# Altium PCB PCB3.PcbDoc
Units mm, origin at the board's own origin, x right, y up, seen from the top; angles counter-clockwise.
Board outline 70.1 x 70.1 mm, 2 copper layers (Top Layer, Bottom Layer); 61 components, 64 nets, 281 pads, 0 vias.
Unrouted connection lines stored in the file: 170.
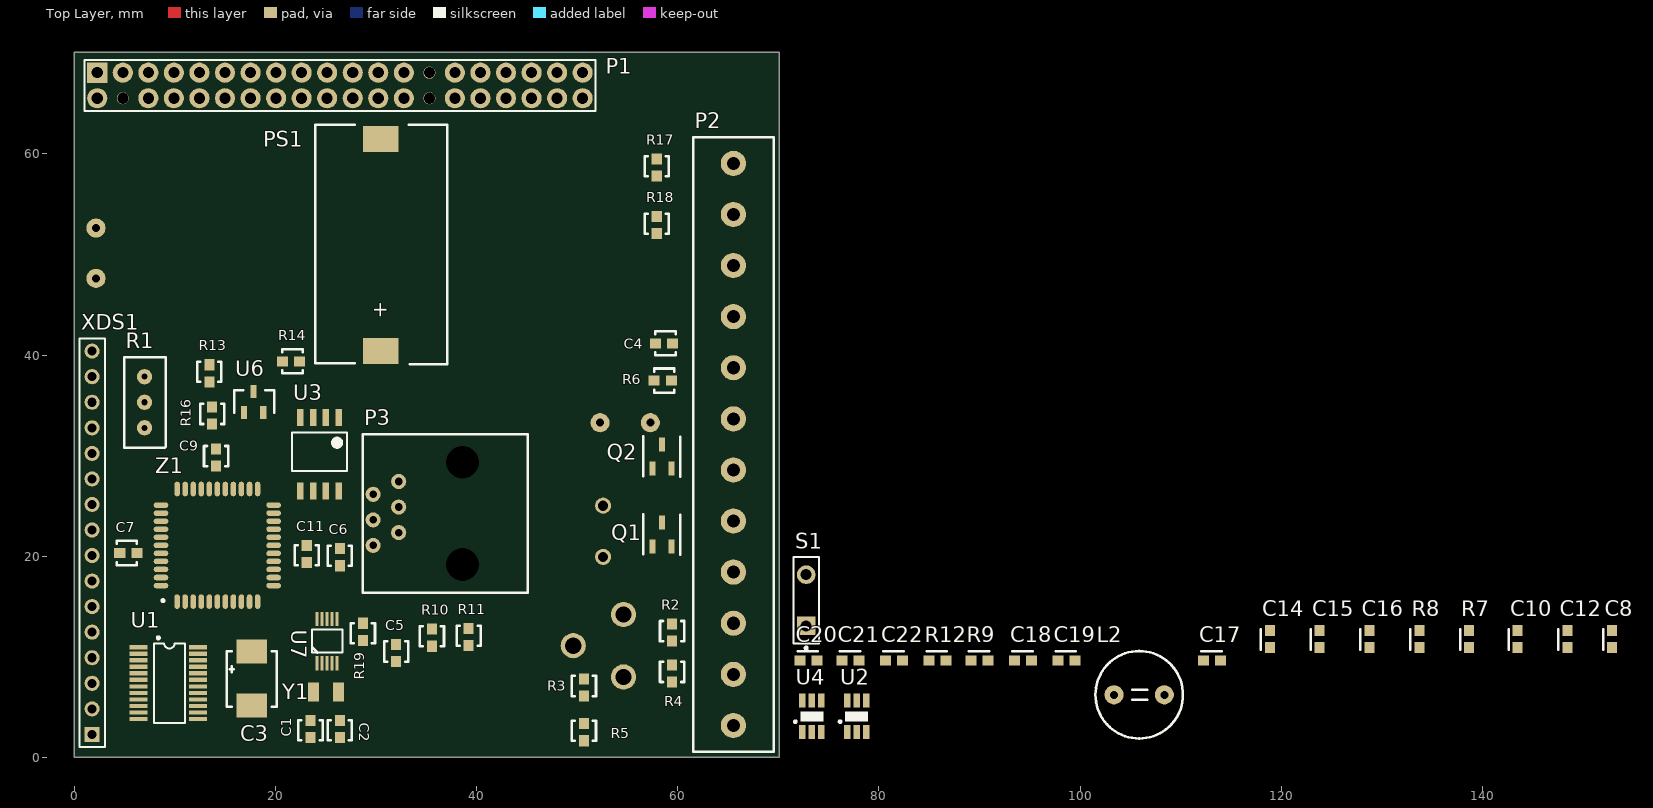
[diagram p0: Top Layer view]
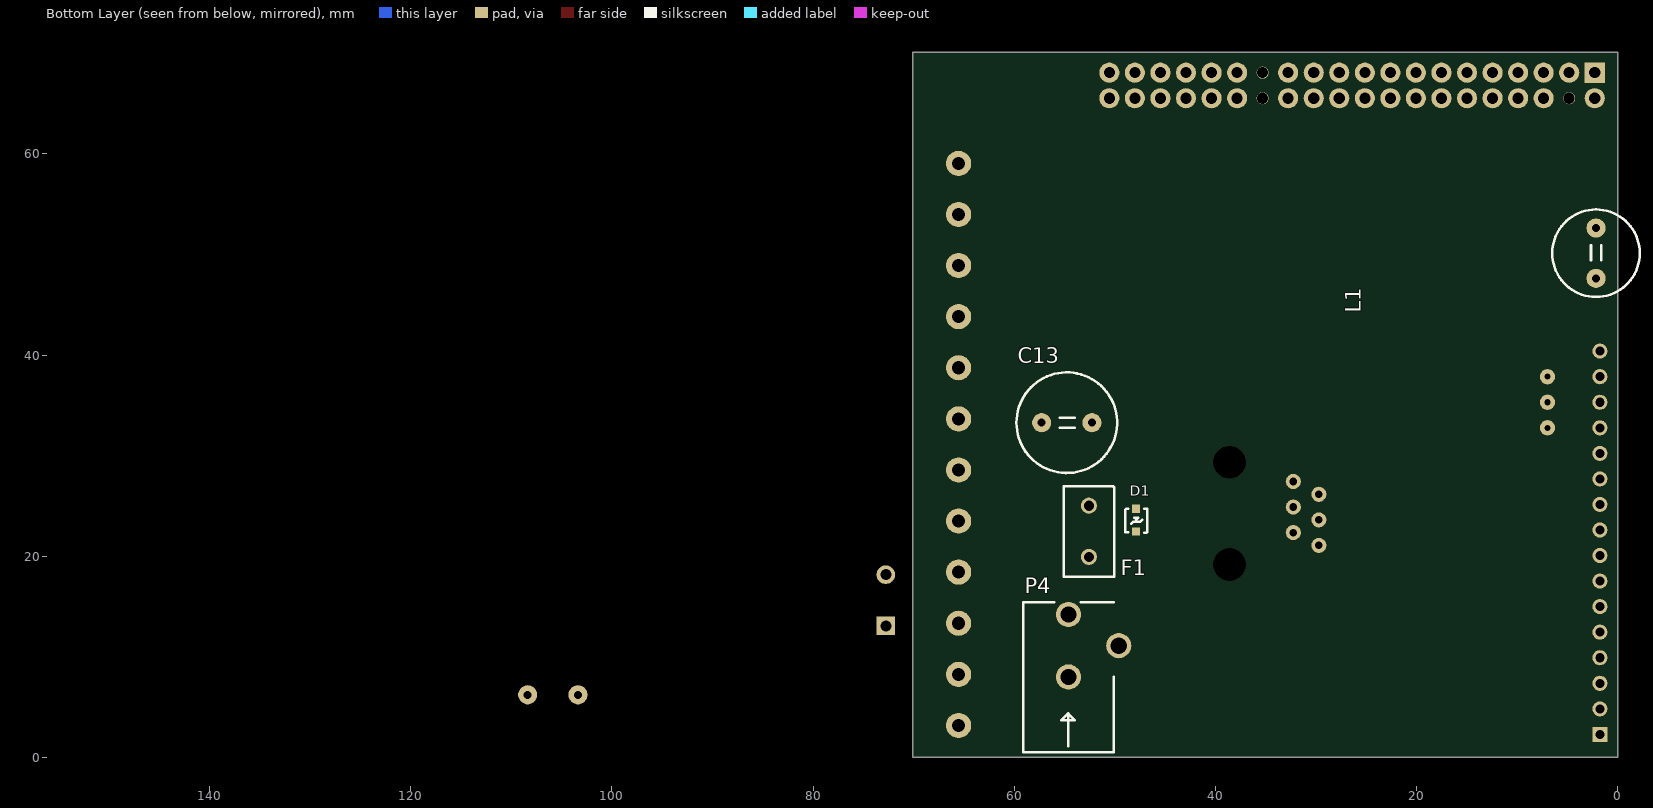
[diagram p1: Bottom Layer view, seen from below]

## Layer stack, top to bottom
Top Solder: solder mask 0.0102, Solder Resist, Dk 3.5
Top Layer: signal copper 0.0356
Dielectric 1: dielectric 0.32, FR-4, Dk 4.8
Bottom Layer: signal copper 0.0356
Bottom Solder: solder mask 0.0102, Solder Resist, Dk 3.5

## Board outline
0,0 70.104,0 70.104,70.104 0,70.104

## Design rules (kind name [scope] priority, off if disabled: settings)
Clearance [All] p1: gap=0.254
PolygonConnect [All] p1: connectstyle=Relief reliefconductorwidth=0.254 reliefentries=4 polygonreliefangle="90 Angle" airgapwidth=0.254
RoomDefinition VRAIMENTHORSPCB [InComponentClass('VRAIMENTHORSPCB')] p1: confinementstyle=ConfineIn formatcopy=TRUE lockcomponents=FALSE outline 71.247,10.414 74.295,10.414 74.295,22.733 71.247,22.733
RoomDefinition Power [InComponentClass('Power')] p2: confinementstyle=ConfineIn formatcopy=TRUE lockcomponents=FALSE outline 71.247,1.524 79.375,1.524 79.375,9.144 71.247,9.144
RoutingVias [All] p1: holewidth=0.711 width=1.27 viastyle="Through Hole" minholewidth=0.711 minwidth=1.27 maxholewidth=0.711 maxwidth=1.27
SolderMaskExpansion [All] p1: expansion=0.102
UnpouredPolygon [All] p1: allowunpoured=FALSE
Width [All] p1: maxlimit=0.254 minlimit=0.254 preferedwidth=0.254
29 further rules are at their usual default settings.

## Classes and differential pairs
component class Ecran: R1 U1 XDS1
component class OTHER: P1 P2 Q1 Q2 R2 R3 R4 R5 R17 R18
component class PIC: C1 C2 C3 C4 C5 C6 C7 C9 C11 P3 R6 R10 R11 R19 U3 U7 Y1 Z1
component class Power: C8 C10 C12 C13 C14 C15 C16 C17 C18 C19 C20 C21 C22 D1 F1 L1 L2 P4 PS1 R7 R8 R9 R12 R13 R14 R16 U2 U4 U6
component class VRAIMENTHORSPCB: * B1 D4 DS1 MCL039PURGW P5 S1
net class RG_LED[0..1]: RG_LED0 RG_LED1
net class S_D[0..7]: S_D0 S_D1 S_D2 S_D3 S_D4 S_D5 S_D6 S_D7

## Components (designator, comment, footprint, x,y, rotation, side; value= is the part's Value field where it differs from the comment)
C1 "18pF" 0603 23.487,3.681 r270 top
C2 "18pF" 0603 26.408,3.681 r270 top
C3 "10uF" C3 17.653,10.541 r270 top
C4 "100nF" 0603 57.785,41.169 r0 top
C5 "0.1uF" 0603 32.004,9.525 r90 top
C6 "22uF" 0603 26.408,19.05 r90 top
C7 "0.1uF" 0603 6.223,20.32 r180 top
C8 "0.1uF" 0603 152.908,10.922 r90 top
C9 "0.1uF" 0603 14.097,28.956 r90 top
C10 "22uF" 0603 143.51,10.922 r90 top
C11 "0.1uF" 0603 23.114,21.082 r270 top
C12 "22uF" 0603 148.463,10.922 r90 top
C13 "1000uF" Condo_trav 57.277,33.274 r180 bottom
C14 "10uF" 0603 118.872,10.922 r90 top
C15 "10uF" 0603 123.825,10.922 r90 top
C16 "0.1uF" 0603 128.778,10.922 r90 top
C17 "0.1uF" 0603 112.268,9.652 r0 top
C18 "22uF" 0603 93.472,9.652 r0 top
C19 "22uF" 0603 97.79,9.652 r0 top
C20 "10uF" 0603 72.136,9.652 r0 top
C21 "10uF" 0603 76.327,9.652 r0 top
C22 "0.1uF" 0603 80.645,9.652 r0 top
D1 "Diode 10TQ035" DiodeZin 47.879,24.716 r270 bottom
F1 "Fuse 1" FUSIBLE 52.578,19.939 r90 bottom
L1 "4.7uH" "Bobine Traversante 4.7" 2.159,47.625 r90 bottom
L2 "3.3uH" "Bobine Traversante 4.7" 103.378,6.223 r0 top
P1 "61304021121" Connect2x20 2.286,68.072 r0 top
P2 "31101112" Bornier12 65.532,59.055 r270 top
P3 "90512-001LF" RJ12 38.608,29.337 r270 top
P4 "FC681465P" JackAlim 54.61,8.001 r90 bottom
PS1 "Support Pile" Pile 30.48,40.386 r90 top
Q1 "MOSFET-N" nouveau_mosfetN 58.42,31.115 r0 top
Q2 "MOSFET-N" nouveau_mosfetN 58.42,23.368 r0 top
R1 "20k" POTARD 6.985,32.766 r90 top
R2 "300k" 0603 59.436,11.557 r90 top
R3 "300k" 0603 50.673,6.096 r90 top
R4 "100k" 0603 59.436,7.493 r90 top
R5 "100k" 0603 50.673,1.651 r90 top
R6 "330" 0603 57.658,37.465 r0 top
R7 "54.9K" 0603 138.684,10.922 r90 top
R8 "10K" 0603 133.731,10.922 r90 top
R9 "33.2K" 0603 89.154,9.652 r0 top
R10 "10K" 0603 35.56,11.049 r90 top
R11 "1Ko" 0603 39.207,11.101 r90 top
R12 "10K" 0603 84.963,9.652 r0 top
R13 "300k" 0603 13.424,37.338 r90 top
R14 "330" 0603 20.701,39.37 r0 top
R16 "100k" 0603 13.716,33.147 r90 top
R17 "60.4" 0603 57.912,57.785 r90 top
R18 "75" 0603 57.912,52.07 r90 top
R19 "330" 0603 28.702,13.335 r270 top
S1 "Bouton Status" SPST-2 72.771,15.621 r90 top
U1 "74LVX4245MTCX" TRANS 12.319,10.957 r270 top
U2 "TPS562201DDCT" TPS562201DDCT 76.835,4.953 r0 top
U3 "SST25VF016B-50-4C-S2AF-T" FLASH 26.289,33.782 r270 top
U4 "TPS562201DDCT" TPS562201DDCT 72.39,4.953 r0 top
U6 "LM809M3-3.08/NOPB" LM809 16.891,34.29 r90 top
U7 "MCP79510-I/MS" rtc 25.146,11.557 r90 top
XDS1 "1-826629-6" HDR1X16 1.778,2.286 r90 top
Y1 "32.768kHz" QUARTZ32KHz 25.019,6.485 r0 top
Z1 "PIC32MX170F256D-I/PT" TQFP-44_L 14.224,21.082 r90 top

## Footprints (in the part's own frame and the unit in brackets; to place one, negate y for a bottom-side part, rotate by r counter-clockwise, add the part's x,y. Pads: shape width x height; smd on the part's side, far side on the other; paste and mask are expansions set on the pad)
0603 [mm] "Chip Inductor, Body 0.6x0.3mm, IPC High Density"
  rect 1.1x1 smd: 1(0,0) 2(1.7,0)
  silkscreen extent 0,-1.2 2,1.2
"Bobine Traversante 4.7" [mm]
  round 1.9 hole 0.8: 1(0,0) 2(5,0)
  silkscreen extent -1.85,-4.35 6.85,4.35
Bornier12 [mm]
  round 2.5 hole 1.3: 1(0,0) 2(5.08,0) 3(10.16,0) 4(15.24,0) 5(20.32,0) 6(25.4,0) 7(30.48,0) 8(35.56,0) 9(40.64,0) 10(45.72,0) 11(50.8,0) 12(55.88,0)
  silkscreen extent -2.6,-4 58.48,4
C3 [mm]
  rect 2.4x3 smd: 1(0,0) 2(5.4,0)
  silkscreen extent 0,-2.5 5.5,2.5
Condo_trav [mm]
  round 1.9 hole 0.8: 1(0,0) 2(5,0)
  silkscreen extent -2.5,-5 7.5,5
Connect2x20 [mm] "Connector; Header; 20x2 Position"
  round 2 hole 1.1: 1(0,-2.54) 3(2.54,0) 5(5.08,-2.54) 6(5.08,0) 7(7.62,-2.54) 8(7.62,0) 9(10.16,-2.54) 10(10.16,0) 11(12.7,0) 12(12.7,-2.54) 13(15.24,0) 14(15.24,-2.54) 15(17.78,0) 16(17.78,-2.54) 17(20.32,0) 18(20.32,-2.54) 19(22.86,0) 20(22.86,-2.54) 21(25.4,0) 22(25.4,-2.54) 23(27.94,0) 24(27.94,-2.54) 25(30.48,0) 26(30.48,-2.54) 29(35.56,0) 30(35.56,-2.54) 31(38.1,0) 32(38.1,-2.54) 33(40.64,0) 34(40.64,-2.54) 35(43.18,0) 36(43.18,-2.54) 37(45.72,0) 38(45.72,-2.54) 39(48.26,0) 40(48.26,-2.54)
  rect 2x2 hole 1.1: 2(0,0)
  round 1.2 hole 1.1: 4(2.54,-2.54) 27(33.02,0) 28(33.02,-2.54)
  silkscreen extent -1.27,-3.81 49.53,1.27
DiodeZin [mm]
  rect 0.8x0.8 smd: 1(2.25,0) 3(0,0)
  silkscreen extent 0,-1.1 2.4,1.1
FLASH [mm] "8-Pin Plastic Medium Body Small Outline Package 1.27 mm Pitch, IPC Medium Density"
  rect 1.7x0.65 smd: 1(0,0) 2(0,-1.27) 3(0,-2.54) 4(0,-3.81) 5(7.3,-3.81) 6(7.3,-2.54) 7(7.3,-1.27) 8(7.3,0)
  silkscreen extent 1.5,-4.65 5.3,0.84
FUSIBLE [mm]
  round 1.6 hole 1: 1(0,0) 2(5.08,0)
  silkscreen extent -2,-2.5 7,2.5
HDR1X16 [mm] "Connector; Header; 16 Position"
  rect 1.5x1.5 hole 0.9: 1(0,0)
  round 1.5 hole 0.9: 2(2.54,0) 3(5.08,0) 4(7.62,0) 5(10.16,0) 6(12.7,0) 7(15.24,0) 8(17.78,0) 9(20.32,0) 10(22.86,0) 11(25.4,0) 12(27.94,0) 13(30.48,0) 14(33.02,0) 15(35.56,0) 16(38.1,0)
  silkscreen extent -1.27,-1.27 39.37,1.27
JackAlim [mm]
  round 2.5 hole 1.6: 1(6.2,0) 2(3.1,-5) 3(0,0)
  silkscreen extent -7.5,-4.5 7.4,4.5
LM809 [mm]
  rect 1.3x0.6 smd: 1(0,0) 2(0,-1.9) 3(2.1,-0.95)
  silkscreen extent 0,-3 2.2,1
nouveau_mosfetN [mm]
  rect 0.6x1.4 smd: 1(-0.95,-2.4) 2(0.95,-2.4) 3(0,0)
  silkscreen extent -1.85,-3.23 1.85,0.83
Pile [mm]
  rect 2.6x3.5 smd: 1(0,0) 2(21.1,0)
  silkscreen extent -1.3,-6.6 22.5,6.5
POTARD [mil]
  round 60 hole 23.62: 1(0,0) 2(100,0) 3(200,0)
  silkscreen extent -79,-83 276,79
QUARTZ32KHz [mm]
  rect 1.1x1.9 smd: 1(-1.25,0) 2(1.25,0)
RJ12 [mm]
  round 1.524 hole 3.25 unplated: 0(0,0) 0(10.16,0)
  round 1.5 hole 0.762: 1(1.91,-6.35) 2(3.18,-8.89) 3(4.45,-6.35) 4(5.72,-8.89) 5(6.99,-6.35) 6(8.26,-8.89)
  silkscreen extent -2.8,-9.91 12.96,6.47
rtc [mm]
  rect 1.4x0.3 smd: 1(-2.2,1) 2(-2.2,0.5) 3(-2.2,0) 4(-2.2,-0.5) 5(-2.2,-1) 6(2.2,-1) 7(2.2,-0.5) 8(2.2,0) 9(2.2,0.5) 10(2.2,1)
  silkscreen extent -1.15,-1.5 1.15,1.5
SPST-2 [mm] "Switch; 2 Leads"
  rect 1.85x1.85 hole 1.1: 1(-2.54,0)
  round 1.85 hole 1.1: 2(2.54,0)
  silkscreen extent -4.89,-1.27 4.28,1.27
TPS562201DDCT [mm]
  rect 0.65x1.4 smd: 1(0,-2.45) 2(0.95,-2.45) 3(1.9,-2.45) 4(1.9,0.7) 5(0.95,0.7) 6(0,0.7)
  silkscreen extent -0.8,-1.5 2.1,-0.4
TQFP-44_L [mm] "44-Pin Thin Quad Flat Pack 0.8 mm Pitch, 1.0/0.1 mm Lead Form, IPC High Density"
  oval 1.45x0.55 smd: 1(-5.6,4) 2(-5.6,3.2) 3(-5.6,2.4) 4(-5.6,1.6) 5(-5.6,0.8) 6(-5.6,0) 7(-5.6,-0.8) 8(-5.6,-1.6) 9(-5.6,-2.4) 10(-5.6,-3.2) 11(-5.6,-4) 23(5.6,-4) 24(5.6,-3.2) 25(5.6,-2.4) 26(5.6,-1.6) 27(5.6,-0.8) 28(5.6,0) 29(5.6,0.8) 30(5.6,1.6) 31(5.6,2.4) 32(5.6,3.2) 33(5.6,4)
  oval 0.55x1.45 smd: 12(-4,-5.6) 13(-3.2,-5.6) 14(-2.4,-5.6) 15(-1.6,-5.6) 16(-0.8,-5.6) 17(0,-5.6) 18(0.8,-5.6) 19(1.6,-5.6) 20(2.4,-5.6) 21(3.2,-5.6) 22(4,-5.6) 34(4,5.6) 35(3.2,5.6) 36(2.4,5.6) 37(1.6,5.6) 38(0.8,5.6) 39(0,5.6) 40(-0.8,5.6) 41(-1.6,5.6) 42(-2.4,5.6) 43(-3.2,5.6) 44(-4,5.6)
  silkscreen extent -5.62,5.27 -5.38,5.52
TRANS [mm] "Shrink Small Outline; 24 Leads; Body Width 4.4 mm; Pitch 0.65 mm"
  rect 0.42x1.78 smd: 1(0,-5.94) 2(0.65,-5.94) 3(1.3,-5.94) 4(1.95,-5.94) 5(2.6,-5.94) 6(3.25,-5.94) 7(3.9,-5.94) 8(4.55,-5.94) 9(5.2,-5.94) 10(5.85,-5.94) 11(6.5,-5.94) 12(7.15,-5.94) 13(7.15,0) 14(6.5,0) 15(5.85,0) 16(5.2,0) 17(4.55,0) 18(3.9,0) 19(3.25,0) 20(2.6,0) 21(1.95,0) 22(1.3,0) 23(0.65,0) 24(0,0)
  silkscreen extent -1.05,-4.42 7.53,-1.31

## Part data
C1 C2 C4 C5 C7 C9 C11 C13: library part Cap, "Capacitor"
C3: library part "Cap Pol1"
C6: library part Cap, "Cout_Reg_3.3v"
C8 C10 C12 C14 C15 C16 C17 C18 C19 C20 C21 C22: library part Cap, "Reg_5v"
D1: "Diode Zenner"
F1: "Fuse"
L1: library part Inductor, "L_Reg_5v"
L2: library part Inductor, "L_Reg_3v"
P1: library part "Header 20X2", "Header, 20-Pin, Dual row"
P2: library part "Header 12", "Header, 12-Pin"
P3: library part "Header 6", "PortRJ12_debug"
P4: library part FC68148S, "Power connector"
PS1: library part SMTU-1225-1-LF
Q1 Q2: "N-Channel MOSFET"
R1: library part RPot, "Potentiometer"
R2 R3 R4 R5 R6 R7 R8 R9 R10 R11 R12 R13 R14 R16 R17 R18 R19: library part Res2, "Resistor"
S1: library part SW-PB, "Switch"
U1: "Bus Transceiver"
U2 U4: "Reg 12V-5V"
U3: library part Memoire, "FLASH"
U6: "Voltage Monitor"
U7: library part MCP79510, "RTC"
XDS1: library part "Header 16", "Header, 16-Pin"
Y1: library part XTAL, "Crystal Oscillator"
Z1: library part PIC32_1, "PIC"

## Nets (pads, with @x,y where several pads share a name; then routed paths per layer and width w, separated by ;. In a path a pad name is that pad's centre, name@x,y a point inside that pad or via, vN(x,y) a via of type N, cw(c..) or ccw(c..) an arc to the next point about the centre after c; other vN are vias at no path point)
5VDC: C10.1 C12.1 L1.1 P1.2 R1.1 R7.1 U1.1 XDS1.2 XDS1.15
12VDC: C13.2 C14.1 C15.1 C16.1 C20.1 C21.1 C22.1 D1.1 F1.2 P2.12 R13.2 U2.3 U4.3
CMD_SERVO: P2.3 Z1.31
CR_DATA0_3V: R2.1 R4.2 Z1.25
CR_DATA0_12V: P2.10 R2.2
CR_DATA1_3V: R3.1 R5.2 Z1.26
CR_DATA1_12V: P2.11 R3.2
CR_LED_G: Q2.2 Z1.30
CR_LED_G_CTRL: P2.8 Q2.1
CR_LED_R: Q1.2 Z1.27
CR_LED_R_CTRL: P2.7 Q1.1
FLSH_CE: U3.1 Z1.12
GND: C1.1 C2.1 C3.2 C4.1 C5.1 C6.1 C7.2 C9.2 C10.2 C11.2 C12.2 C13.1 C14.2 C15.2 C16.2 C18.2 C19.2 C20.2 C21.2 C22.2 D1.3 P1.6 P2.5 P2.9 P3.3 P4.3 PS1.2 Q1.3 Q2.3 R1.3 R4.1 R5.1 R8.1 R12.1 R16.1 S1.2 U1.11 U1.12 U1.13 U1.22 U2.1 U3.4 U4.1 U6.1 U7.5 XDS1.1 XDS1.16 Z1.6 Z1.16 Z1.20 Z1.29 Z1.39
MCLR: P3.1 R11.2 Z1.18
NetC3_1: C3.1 Z1.7
NetC5_2: C5.2 R10.1 R11.1
NetC8_1: C8.1 L1.2 U2.2
NetC8_2: C8.2 U2.6
NetC17_1: C17.1 L2.2 U4.2
NetC17_2: C17.2 U4.6
NetF1_1: F1.1 P4.1
NetP2_1: P2.1 R17.2
NetP2_2: P2.2 R18.2
NetR7_2: R7.2 R8.2 U2.4
NetR9_2: R9.2 R12.2 U4.4
NetR19_1: R19.1 U7.9
PGEC1: P3.5 Z1.22
PGED1: P3.4 Z1.21
PIC_RASPI_RXD: P1.8 Z1.33
PIC_RASPI_TXD: P1.10 Z1.34
POT_CONTRASTE: R1.2 XDS1.3
POWEROK: R14.1 U6.2 Z1.19
RG_LED0: R17.1 Z1.23
RG_LED1: R18.1 Z1.24
RTC_CS: U7.4 Z1.11
S_D0: U1.21 Z1.1
S_D1: U1.20 Z1.2
S_D2: U1.19 Z1.3
S_D3: U1.18 Z1.4
S_D4: U1.17 Z1.5
S_D5: U1.16 Z1.8
S_D6: U1.15 Z1.37
S_D7: U1.14 Z1.38
S_E: XDS1.6 Z1.44
S_RS: XDS1.4 Z1.42
S_RW: XDS1.5 Z1.43
SPI_SCK: U3.6 U7.8 Z1.14
SPI_SI: U3.2 U7.7 Z1.13
SPI_SO: U3.5 U7.6 Z1.15
STATUS_BTN: C4.2 P2.6 R6.2 Z1.32
TS_D0: U1.3 XDS1.7
TS_D1: U1.4 XDS1.8
TS_D2: U1.5 XDS1.9
TS_D3: U1.6 XDS1.10
TS_D4: U1.7 XDS1.11
TS_D5: U1.8 XDS1.12
TS_D6: U1.9 XDS1.13
TS_D7: U1.10 XDS1.14
TS_TR: U1.2 Z1.41
U6_VCC: R13.1 R16.2 U6.3
VBAT: PS1.1 U7.3
VOUT3.3: C6.2 C7.1 C9.1 C11.1 C18.1 C19.1 L2.1 P2.4 P3.2 R6.1 R9.1 R10.2 R14.2 R19.2 U1.23 U1.24 U3.3 U3.7 U3.8 U7.10 Z1.17 Z1.28 Z1.40
X1: C1.2 U7.1 Y1.1
X2: C2.2 U7.2 Y1.2
pads on no net: P1.1 P1.3 P1.4 P1.5 P1.7 P1.9 P1.11 P1.12 P1.13 P1.14 P1.15 P1.16 P1.17 P1.18 P1.19 P1.20 P1.21 P1.22 P1.23 P1.24 P1.25 P1.26 P1.27 P1.28 P1.29 P1.30 P1.31 P1.32 P1.33 P1.34 P1.35 P1.36 P1.37 P1.38 P1.39 P1.40 P3.0 P3.6 P4.2 S1.1 U2.5 U4.5 Z1.9 Z1.10 Z1.35 Z1.36

## Text inside footprints (layer, text, board x,y; h text height)
PS1: Top Overlay "+" at 31.08,43.586 h1.52 r90